# Allegro board proiect_layout.brd
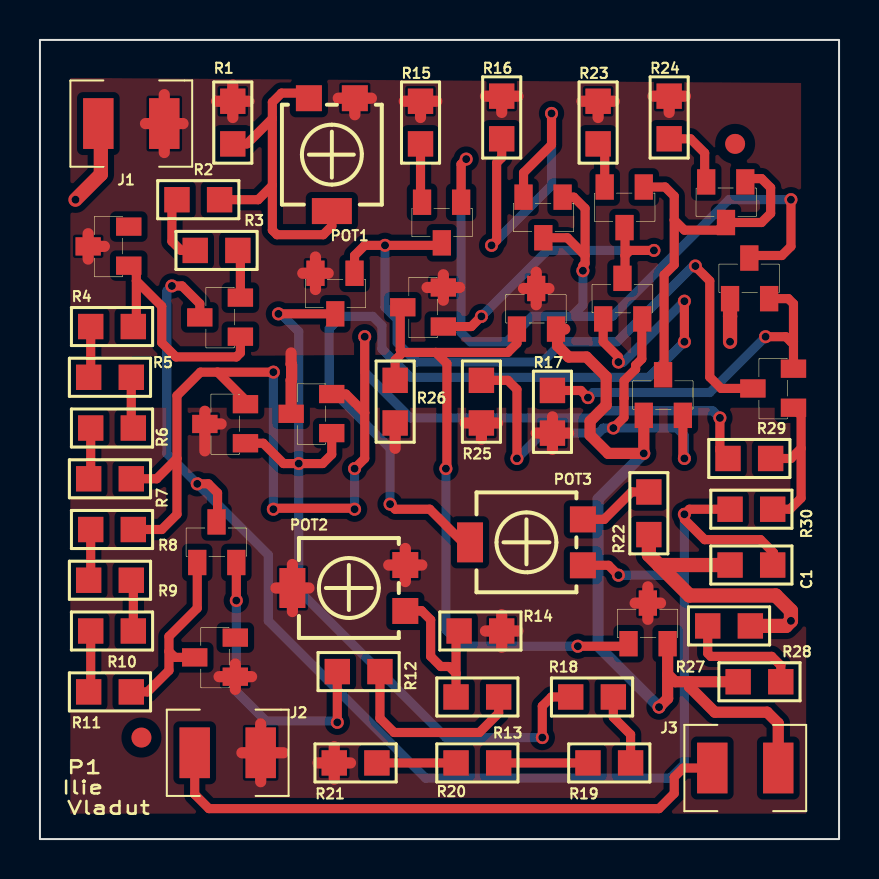
[diagram p0: board, top side]
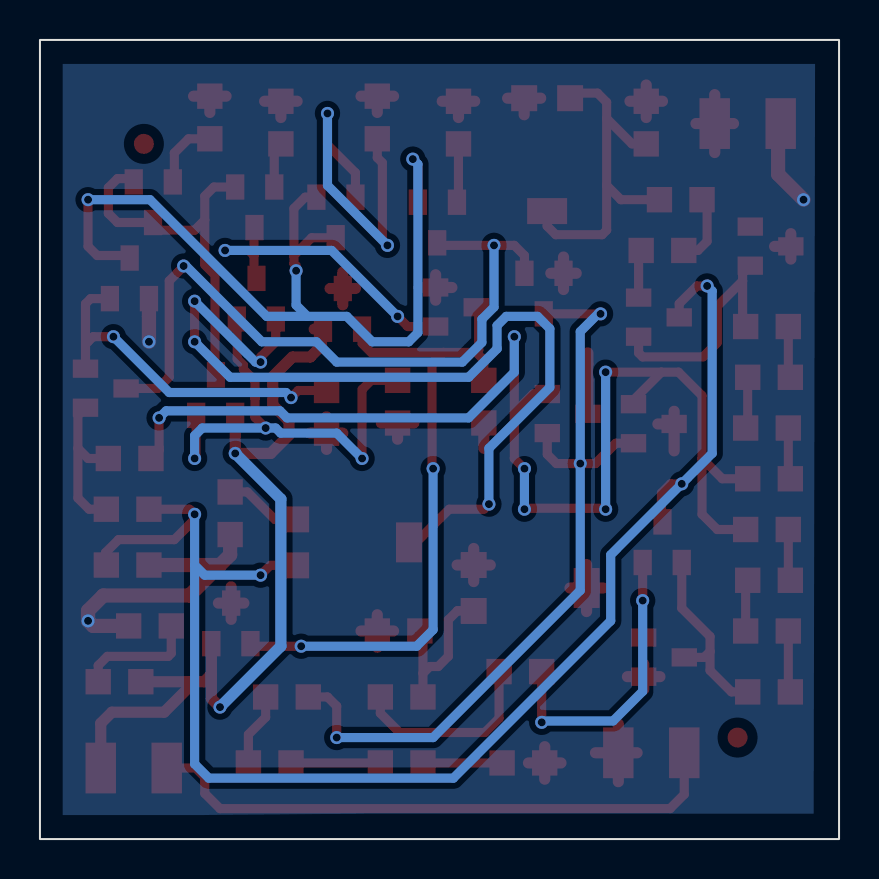
[diagram p1: board, bottom side, seen from below]

Outline 40 x 40 mm; copper layers: TOP, BOTTOM. Coordinates in mm from the lower left corner of the outline.
Outline path: rectangle 0,0 40,40

## Design rules (mm)
nets with their own width: min track width 0.457; nets N212907 N213095 N213199 N213205 N213257 N213263 N213321 N213327 N213335 N213415 N213429 N213443 N213457 N213511 N213547 N213669 N213703 N213707 N213717 N213723 N213775 N213883 N213941 N213951 N214061 N214089 N214141 N214167 N214279 N214365 N214535 N214729 N222149 N2141271 N2144991 N2145211
nets with their own width: min track width 0.559; nets OUT VCC VEE
nets with their own width: min track width 0.711; nets GND

## Placement (name value [footprint] x y rotation side)
C1  470p  [SMC0805]  34.54 13.72 0 top
DZ1  BZX84-C2V7  [TO236]  4.32 28.7 0 top
DZ2  BZX84-C2V7  [TO236]  9.65 8.13 0 top
J1  CON2  [1210RF_WV_12D]  4.57 35.81 0 top
J2  CON2  [1210RF_WV_12D]  9.4 4.32 0 top
J3  CON2  [1210RF_WV_12D]  35.31 3.56 180 top
NOREF  -  [unnamed]  5.08 5.08 0 top
NOREF#2  -  [#2]  40 0 90 top
NOREF#3  -  [#2]  0 0 0 top
NOREF#4  -  [unnamed]  34.8 34.8 0 top
POT1  500k  [TS53YL]  13.46 37.08 90 top
POT2  500k  [TS53YL]  18.29 13.72 0 top
POT3  500k  [TS53YL]  27.18 16 0 top
Q1  QBC856B  [TO236]  9.91 25.15 0 top
Q2  QBC846B  [TO236]  7.87 13.97 270 top
Q3  QBC856B  [TO236]  21.08 31.75 90 top
Q4  QBC856B  [TO236]  26.16 32 90 top
Q5  QBC846B  [TO236]  37.59 21.59 0 top
Q6  QBC846B  [TO236]  34.54 27.18 270 top
Q7  QBC856B  [TO236]  15.75 28.19 90 top
Q8  QBC856B  [TO236]  10.16 19.81 0 top
Q9  QBC846B  [TO236]  14.48 20.32 0 top
Q10  QBC856B  [TO236]  30.23 32.51 90 top
Q11  QBC856B  [TO236]  35.31 32.77 90 top
Q12  QBC846B  [TO236]  28.19 26.16 270 top
Q13  QBC856B  [TO236]  20.07 25.65 0 top
Q14  QBC846B  [TO236]  30.23 21.34 270 top
Q15  QBC846B  [TO236]  23.88 25.65 270 top
Q16  QBC856B  [TO236]  29.46 9.91 270 top
R1  15K  [SMR0805]  9.65 34.8 90 top
R2  1k  [SMR0805]  6.86 32 0 top
R3  100  [SMR0805]  9.91 29.46 180 top
R4  510  [SMR0805]  2.54 25.65 0 top
R5  510  [SMR0805]  4.57 23.11 180 top
R6  510  [SMR0805]  2.54 20.57 0 top
R7  510  [SMR0805]  4.57 18.03 180 top
R8  510  [SMR0805]  2.54 15.49 0 top
R9  510  [SMR0805]  4.57 12.95 180 top
R10  510  [SMR0805]  2.54 10.41 0 top
R11  510  [SMR0805]  4.57 7.37 180 top
R12  100  [SMR0805]  17.02 8.38 180 top
R13  1k  [SMR0805]  20.83 7.11 0 top
R14  15K  [SMR0805]  23.11 10.41 180 top
R15  51  [SMR0805]  19.05 34.8 90 top
R16  51  [SMR0805]  23.11 35.05 90 top
R17  47k  [SMR0805]  25.65 20.32 90 top
R18  680  [SMR0805]  28.7 7.11 180 top
R19  680  [SMR0805]  27.43 3.81 0 top
R20  680  [SMR0805]  20.83 3.81 0 top
R21  680  [SMR0805]  14.73 3.81 0 top
R22  100k  [SMR0805]  30.48 15.24 90 top
R23  51  [SMR0805]  27.94 34.8 90 top
R24  51  [SMR0805]  31.5 35.05 90 top
R25  22k  [SMR0805]  22.1 20.83 90 top
R26  10K  [SMR0805]  17.78 20.83 90 top
R27  10K  [SMR0805]  37.08 7.87 180 top
R28  15K  [SMR0805]  35.56 10.67 180 top
R29  220k  [SMR0805]  36.58 19.05 180 top
R30  150k  [SMR0805]  34.54 16.51 0 top

## Library data of the parts
C1 = C_0
DZ1 = BZX84-C2V7_7
DZ2 = BZX84-C2V7_8
J1-J3 = CON2
POT1 = POT_0
POT2 POT3 = POT
Q1 = QBC856B_19
Q2 = QBC846B_1
Q3 = QBC856B_20
Q4 = QBC856B_22
Q5 = QBC846B_22
Q6 = QBC846B_28
Q7 = QBC856B_23
Q8 = QBC856B_24
Q9 = QBC846B_24
Q10 = QBC856B_25
Q11 = QBC856B_26
Q12 = QBC846B_25
Q13 = QBC856B_27
Q14 = QBC846B_26
Q15 = QBC846B_27
Q16 = QBC856B_29
R1-R9 R11-R30 = R
R10 = R_0

## Footprints (pads in the part's own frame, mm; a bottom-side part is the same pattern mirrored in y, then rotated)
1210RF_WV_12D
  rect 1.524x2.54 smd: 1(-1.651,0) 2(1.651,0)
SMC0805
  rect 1.27x1.27 smd: 1(0,0) 2(2.134,0)
SMR0805
  rect 1.27x1.27 smd: 1(0,0) 2(2.134,0)
TO236
  rect 1.27x0.914 smd: 1(0.127,0) 2(0.127,1.956) 3(-1.905,0.965)
TS53YL
  rect 1.3x1.3 smd: 1(0,0) 3(0,-2.3)
  rect 1.3x2 smd: 2(-5.65,-1.15)
unnamed
  round 1 smd: (0,0)

## Nets
GND: C1.1 J1.1 Q6.1 R22.1 R28.1
VCC: DZ1.3 J1.2 POT1.3 Q7.2(E) Q9.3 Q13.2(E) Q15.3 R1.2 R15.2 R16.2 R23.2 R24.2
VEE: DZ2.1 J2.2 POT2.1 POT2.2(T) Q8.3 Q16.3 R14.1 R17.1 R21.1 R25.1 R26.1
OUT: J3.1 Q14.1 Q15.2(E) Q16.2(E) R27.2
N212907: C1.2 POT3.3 Q1.3 Q2.3 R30.1
N213095: POT1.1 POT1.2(T) R1.1 R2.2
N213199: Q3.2(E) R15.1
N213205: Q4.2(E) R16.1
N213257: Q10.2(E) R23.1
N213263: Q11.2(E) R24.1
N213321: R2.1 R3.2
N213327: Q3.1 Q4.1 Q4.3 Q6.3
N213335: DZ1.1 Q1.1 R4.2
N213415: Q3.3 Q5.3 Q7.1
N213429: Q10.1 Q11.1 Q11.3 Q14.3
N213443: Q10.3 Q12.3 Q13.1
N213457: Q1.2(E) R3.1
N213511: R4.1 R5.2
N213547: Q7.3 Q8.1 Q9.1 R18.2
N213669: Q8.2(E) Q9.2(E) R7.1 R8.2 R29.2
N213703: Q13.3 Q15.1 Q16.1 R26.2
N213707: R5.1 R6.2
N213717: POT3.2(T) Q12.1
N213723: R6.1 R7.2
N213775: POT3.1 R22.2
N213883: Q5.1 R29.1 R30.2
N213941: R8.1 R9.2
N213951: Q5.2(E) Q6.2(E) R17.2
N214061: Q12.2(E) Q14.2(E) R25.2
N214089: J2.1 J3.2
N214141: R9.1 R10.2
N214167: R10.1 R11.2
N214279: DZ2.3 Q2.1 R11.1
N214365: Q2.2(E) R12.2
N214535: R12.1 R13.2
N214729: POT2.3 R13.1 R14.2
N222149: R19.1 R20.2
N2141271: R27.1 R28.2
N2144991: R18.1 R19.2
N2145211: R20.1 R21.2

Pads without a net: DZ1 2; DZ2 2

## Via types
v1: diameter 0.654, hole 0.4, TOP to BOTTOM, 40 vias

## Routing (per net, layer and track width the routed paths; a pad name or vN(x,y) marks a point on that pad's centre or on a via; arc(x,y) is an arc through that point)
GND: length 22
  TOP w0.711: 30.99,13.72 30.48,14.22 R22.1 ; 30.99,13.72 32.51,12.19 36.83,12.19 37.59,11.43 v1(37.59,10.92) 37.34,10.67 R28.1 ; 30.99,13.72 C1.1 ; v1(34.54,24.89) 34.54,26.16 Q6.1 ; v1(1.78,32) 3.05,33.27 3.05,35.69 2.92,35.81
VCC: length 34.1
  TOP w0.559: 24.84,26.75 Q15.3 ; Q15.3 24.84,28.37 ; Q15.3 24.21,27.56 ; Q15.3 25.48,27.56 ; 13.16,28.32 Q7.2 ; Q7.2 14.43,28.32 ; Q7.2 13.79,29.13 ; Q7.2 13.79,27.51 ; 23.11,36.37 R16.2 ; R16.2 23.93,37.19 ; R16.2 22.3,37.19 ; 31.5,36.37 R24.2 ; R24.2 30.68,37.19 ; R24.2 32.31,37.19 ; R1.2 9.65,37.74 ; R1.2 9.65,36.12 ; R1.2 8.84,36.93 ; R1.2 10.47,36.93 ; R15.2 19.86,36.93 ; R15.2 19.05,36.12 ; R15.2 18.24,36.93 ; 2.41,29.03 DZ1.3 ; DZ1.3 2.41,30.3 ; DZ1.3 3.23,29.67 ; Q13.2 21.01,27.61 ; Q13.2 20.19,28.25 ; Q13.2 19.38,27.61 ; Q13.2 20.19,26.97 ; 14.93,37.08 POT1.3 ; POT1.3 16.59,37.08 ; POT1.3 15.76,36.26 ; J1.2 7.16,35.81 ; J1.2 5.28,35.81 ; J1.2 6.22,37.26 ; J1.2 6.22,34.37 ; Q9.3 12.57,22.97 12.6,22.99 12.6,23.75 12.57,23.77 12.57,24.33 ; 27.94,36.12 R23.2 ; R23.2 27.13,36.93 ; R23.2 28.75,36.93
VEE: length 34.4
  TOP w0.559: 17.46,13.72 POT2.1 ; POT2.1 19.12,13.72 ; POT2.1 18.29,14.54 ; POT2.1 18.29,12.89 ; 9.78,7.49 DZ2.1 ; DZ2.1 9.78,8.76 ; DZ2.1 10.59,8.13 ; DZ2.1 8.97,8.13 ; 24.84,20.32 R17.1 ; R17.1 26.47,20.32 ; R17.1 25.65,19.51 ; R17.1 25.65,21.13 ; 12.19,4.32 J2.2 ; J2.2 11.05,2.87 ; J2.2 10.11,4.32 ; J2.2 11.05,5.77 ; Q8.3 8.26,21.41 ; Q8.3 9.07,20.78 ; Q8.3 8.26,19.43 ; 17.78,19.56 R26.1 ; R21.1 15.55,3.81 ; R21.1 13.92,3.81 ; R21.1 14.73,4.62 ; R21.1 14.73,3 ; 21.28,20.83 R25.1 ; R25.1 22.1,20.01 ; R25.1 22.91,20.83 ; POT2.2 12.64,13.74 ; POT2.2 12.64,11.39 ; POT2.2 11.81,12.57 ; POT2.2 13.47,12.57 ; Q16.3 30.43,12.62 ; Q16.3 30.43,11 ; Q16.3 29.79,11.81 ; Q16.3 31.06,11.81 ; R14.1 23.93,10.41 ; R14.1 23.11,11.23 ; R14.1 23.11,9.6 ; R14.1 22.3,10.41
OUT: length 42.3
  TOP w0.559: Q14.1 v1(30.23,19.3) 28.45,19.3 27.54,20.22 27.54,20.91 28.34,21.72 28.34,23.14 27.36,24.13 26.47,24.13 25.91,24.69 25.91,25.45 Q15.2 26.27,25.53 ; 32.51,7.87 31.79,7.87 31.42,8.25 ; 32.51,7.87 32.51,7.62 33.78,6.35 36.4,6.35 36.96,5.79 J3.1 ; 32.51,7.87 R27.2 ; 31.42,8.25 31.42,7.04 v1(30.99,6.6) ; 31.42,8.25 Q16.2
  BOTTOM w0.559: v1(30.23,19.3) 27.94,17.02 27.94,9.65 v1(30.99,6.6)
N212907: length 74.9
  TOP w0.457: v1(28.96,13.21) 28.46,13.7 POT3.3 ; Q2.3 8.89,15.93 8.89,17.32 8.43,17.78 v1(7.87,17.78) ; R30.1 32.51,16.51 v1(32.26,16.26) 32.26,16 33.27,14.99 36.07,14.99 36.72,14.33 36.72,13.76 C1.2 ; v1(6.6,27.69) 7.11,27.69 8,26.8 8,26.11
  BOTTOM w0.457: 32.26,13.72 32.26,3.76 31.55,3.05 19.3,3.05 11.43,10.92 11.43,14.22 v1(7.87,17.78) 6.35,19.3 6.35,27.43 v1(6.6,27.69) ; 32.26,13.72 31.75,13.21 v1(28.96,13.21) ; 32.26,13.72 v1(32.26,16.26)
N213095: length 18
  TOP w0.457: R1.1 10.36,34.8 11.63,36.07 ; 11.63,32.72 11.63,30.48 11.86,30.25 14.18,30.25 14.61,30.68 POT1.2 ; 11.63,32.72 10.92,32 R2.2 ; 11.63,32.72 11.63,36.07 ; 11.63,36.07 11.63,36.88 12.09,37.34 13.21,37.34 POT1.1
N213199: length 3
  TOP w0.457: Q3.2 19.05,31.95 R15.1
N213205: length 18.2
  TOP w0.457: Q4.2 24.21,33.35 25.61,34.75 v1(25.61,36.32) ; v1(22.61,29.72) 22.86,29.97 22.86,33.85 23.11,34.11 R16.1
  BOTTOM w0.457: v1(25.61,36.32) 25.61,32.72 v1(22.61,29.72)
N213257: length 2.3
  TOP w0.457: R23.1 28.27,34.47 Q10.2
N213263: length 3.6
  TOP w0.457: R24.1 32.56,35.05 33.27,34.34 33.27,32.97 Q11.2
N213321: length 3.5
  TOP w0.457: R3.2 7.06,29.46 6.6,29.92 6.6,31.75 R2.1
N213327: length 44.9
  TOP w0.457: v1(37.59,32) 37.59,29.67 37.13,29.21 35.64,29.21 Q6.3 ; v1(21.34,34.04) 21.08,33.78 Q3.1 ; 27.29,29.21 27.29,31.56 26.72,32.13 Q4.1 ; 27.29,29.21 26.4,30.1 25.2,30.1 ; 27.29,29.21 27.29,28.81 27.18,28.7 v1(27.18,28.45)
  BOTTOM w0.457: 26.61,26.16 28.65,26.16 34.49,32 v1(37.59,32) ; 26.61,26.16 24.64,26.16 23.37,24.89 21.54,24.89 21.08,25.35 21.08,33.78 v1(21.34,34.04) ; 26.61,26.16 27.18,26.73 v1(27.18,28.45)
N213335: length 12
  TOP w0.457: DZ1.1 4.83,28.32 4.83,27.94 ; 4.83,27.94 4.83,25.81 R4.2 ; 4.83,27.94 6.1,26.67 6.1,24.85 6.81,24.13 9.83,24.13 10.03,24.33 10.03,25.15
N213415: length 36.2
  TOP w0.457: Q3.3 19.99,29.72 v1(17.27,29.72) 16.26,29.72 15.75,29.21 Q7.1 ; Q5.3 34.1,22.56 33.53,23.13 33.53,27.94 32.81,28.66 v1(32.81,28.68)
  BOTTOM w0.457: v1(17.27,29.72) 17.27,26.63 17.88,26.02 17.88,24.86 18.86,23.88 25.15,23.88 26.16,24.89 28.89,24.89 32.69,28.68 v1(32.81,28.68)
N213429: length 19.1
  TOP w0.457: 31.75,30.99 31.75,32.18 31.29,32.64 Q10.1 ; 31.75,30.99 32.26,30.48 33.96,30.48 Q11.3 36.12,30.86 36.58,31.32 36.58,32.6 36.12,33.06 35.47,33.06 Q11.1 ; 31.75,30.99 31.75,28.75 31.24,28.24 31.24,23.29 Q14.3
N213443: length 16.3
  TOP w0.457: 29.29,29.21 29.29,30.58 Q10.3 ; 29.29,29.21 29.29,28.07 Q12.3 ; 29.29,29.21 29.54,29.46 v1(30.73,29.46) ; Q13.1 21.59,25.65 v1(22.1,26.16)
  BOTTOM w0.457: v1(22.1,26.16) 25.4,29.46 v1(30.73,29.46)
N213457: length 2.4
  TOP w0.457: R3.1 10.03,29.34 10.03,27.1
N213511: length 2.6
  TOP w0.457: R5.2 2.54,23.22 R4.1
N213547: length 41.6
  TOP w0.457: Q7.3 v1(11.94,26.29) ; R18.2 25.6,7.11 25.15,6.65 v1(25.15,5.08) ; Q9.1 14.61,19.25 14.15,18.8 v1(12.95,18.8) 12.19,18.8 11.18,19.81 Q8.1
  BOTTOM w0.457: v1(25.15,5.08) 20.32,5.08 12.95,12.45 v1(12.95,18.8) 12.95,25.4 12.06,26.29 v1(11.94,26.29)
N213669: length 63.5
  TOP w0.457: 8.89,23.37 8.03,23.37 6.86,22.2 6.86,19.05 ; 8.89,23.37 v1(11.68,23.37) ; 8.89,23.37 10.29,21.97 Q8.2 ; v1(34.04,21.08) 34.04,19.46 R29.2 ; R8.2 6.1,15.49 6.86,16.26 6.86,19.05 ; v1(15.75,16.51) 15.7,16.56 11.73,16.56 v1(11.68,16.51) ; v1(16.26,25.15) 16.26,21.34 ; 16.26,21.34 16.26,19.05 v1(15.75,18.54) ; 16.26,21.34 15.32,22.28 Q9.2 ; 6.86,19.05 5.84,18.03 R7.1
  BOTTOM w0.457: v1(34.04,21.08) 33.68,21.43 27.99,21.43 27.63,21.08 18.54,21.08 16.26,23.37 v1(16.26,25.15) ; v1(15.75,18.54) v1(15.75,16.51) ; v1(11.68,16.51) v1(11.68,23.37)
N213703: length 34.2
  TOP w0.457: v1(26.92,9.65) 29.34,9.65 Q16.1 ; R26.2 17.78,23.98 18.16,24.36 ; Q13.3 18.03,26.49 18.03,24.49 18.16,24.36 ; v1(20.32,18.54) 20.37,18.59 20.37,23.8 19.81,24.36 ; Q15.1 23.88,24.82 23.42,24.36 19.81,24.36 ; 19.81,24.36 18.16,24.36
  BOTTOM w0.457: v1(26.92,9.65) 21.14,9.65 20.32,10.48 v1(20.32,18.54)
N213707: length 2.6
  TOP w0.457: R6.2 4.57,20.68 R5.1
N213717: length 44.6
  TOP w0.457: v1(17.53,16.76) 17.78,16.51 19.51,16.51 21.17,14.85 POT3.2 ; Q12.1 28.19,24.89 28.96,24.13 v1(28.96,23.88) ; v1(32.26,24.89) v1(32.26,26.92)
  BOTTOM w0.457: v1(32.26,26.92) 29.21,23.88 v1(28.96,23.88) ; v1(17.53,16.76) 17.53,19.56 14.48,22.61 14.48,25.55 15.09,26.16 16.66,26.16 17.12,25.7 17.12,24.54 18.54,23.11 30.48,23.11 v1(32.26,24.89)
N213723: length 2.6
  TOP w0.457: R6.1 2.54,18.14 R7.2
N213775: length 3.9
  TOP w0.457: POT3.1 28.24,16 29.62,17.37 R22.2
N213883: length 8.1
  TOP w0.457: R30.2 37.54,16.51 38.1,17.07 38.1,19.56 ; R29.1 37.59,19.05 38.1,19.56 ; 38.1,19.56 38.1,21.21 Q5.1
N213941: length 2.6
  TOP w0.457: R9.2 2.54,13.06 R8.1
N213951: length 18.3
  TOP w0.457: 37.72,24.89 Q5.2 37.59,23.67 ; 37.72,24.89 37.59,24.89 37.34,25.15 v1(36.32,25.15) ; 37.72,24.89 37.72,26.79 37.46,27.05 Q6.2 ; R17.2 27.08,22.45 v1(27.43,22.1)
  BOTTOM w0.457: v1(27.43,22.1) 27.69,22.35 33.53,22.35 v1(36.32,25.15)
N214061: length 24
  TOP w0.457: v1(32.26,19.05) 32.18,19.13 Q14.2 ; v1(28.7,20.57) 29.24,21.11 29.24,22.06 29.24,22.07 29.24,22.94 29.82,23.52 29.82,23.72 30.13,24.03 30.13,25.82 30.15,25.84 Q12.2 ; R25.2 23.42,22.96 23.88,22.5 v1(23.88,19.05)
  BOTTOM w0.457: v1(23.88,19.05) 25.15,20.32 27.95,20.32 28.2,20.57 v1(28.7,20.57) 31.88,20.57 32.26,20.19 v1(32.26,19.05)
N214089: length 29.6
  TOP w0.457: 33.66,3.56 32.21,3.56 31.75,3.1 31.75,2.29 30.99,1.52 8.46,1.52 7.75,2.24 J2.1
N214141: length 2.6
  TOP w0.457: R10.2 4.67,12.85 R9.1
N214167: length 3.1
  TOP w0.457: R10.1 2.54,7.47 R11.2
N214279: length 9.8
  TOP w0.457: 6.46,9.39 6.46,8.44 5.38,7.37 R11.1 ; 6.46,9.39 6.75,9.09 7.75,9.09 7.7,9.14 ; 6.46,9.39 6.46,10.14 7.87,11.56 Q2.1
N214365: length 14.7
  TOP w0.457: Q2.2 v1(9.83,11.94) ; R12.2 v1(14.88,5.84)
  BOTTOM w0.457: v1(14.88,5.84) 14.81,5.91 11.31,5.91 9.83,7.39 v1(9.83,11.94)
N214535: length 9.8
  TOP w0.457: R13.2 22.96,6.3 22,5.33 17.73,5.33 17.02,6.05 R12.1
N214729: length 9.1
  TOP w0.457: 20.83,8.29 R13.1 ; 20.83,8.29 20.49,8.64 20.07,8.64 19.56,9.14 19.56,10.97 19.1,11.43 18.3,11.43 POT2.3 19.1,11.42 ; 20.83,8.29 20.83,10.26 R14.2
N222149: length 4.5
  TOP w0.457: R20.2 R19.1
N2141271: length 6.1
  TOP w0.457: R28.2 33.43,9.3 33.58,9.14 36.63,9.14 37.08,8.69 R27.1
N2144991: length 3.7
  TOP w0.457: R18.1 28.7,6.1 29.57,5.23 R19.2
N2145211: length 4
  TOP w0.457: R21.2 R20.1

## Copper pours and planes (outline as drawn; the poured copper is in the pictures)
GND on BOTTOM: 1.2,38.8 38.86,38.8 38.86,1.2 32,1.2 23.62,1.27 1.27,1.27
VCC on TOP: 1.52,38.1 1.52,24.13 38.1,24.38 38.1,37.85
VEE on TOP: 1.52,21.59 38.35,21.59 38.35,1.27 1.52,1.27

## Text on the board
Ref Des/Silkscreen Top: Ilie | P1 | Vladut
XSECTION_CHART: *  SURFACE | L1 TOP CONDUCTOR | *  DIELECTRIC | L2 BOTTOM CONDUCTOR | DESIGN CROSS SECTION CHART | ___________________________ | TOTAL THICKNESS 59.055 MIL | 1-2
DIMENSION: FIGURE | FINISHED_SIZE | 15.75 | DRILL CHART: TOP to BOTTOM | ALL UNITS ARE IN MILS | PLATED | QTY | 40
